# Altium PCB PCB1.PcbDoc
Units mm, origin at the board's own origin, x right, y up, seen from the top; angles counter-clockwise.
Board outline 179 x 157.5 mm, 2 copper layers (Top Layer, Bottom Layer); 92 components, 45 nets, 221 pads, 10 vias.
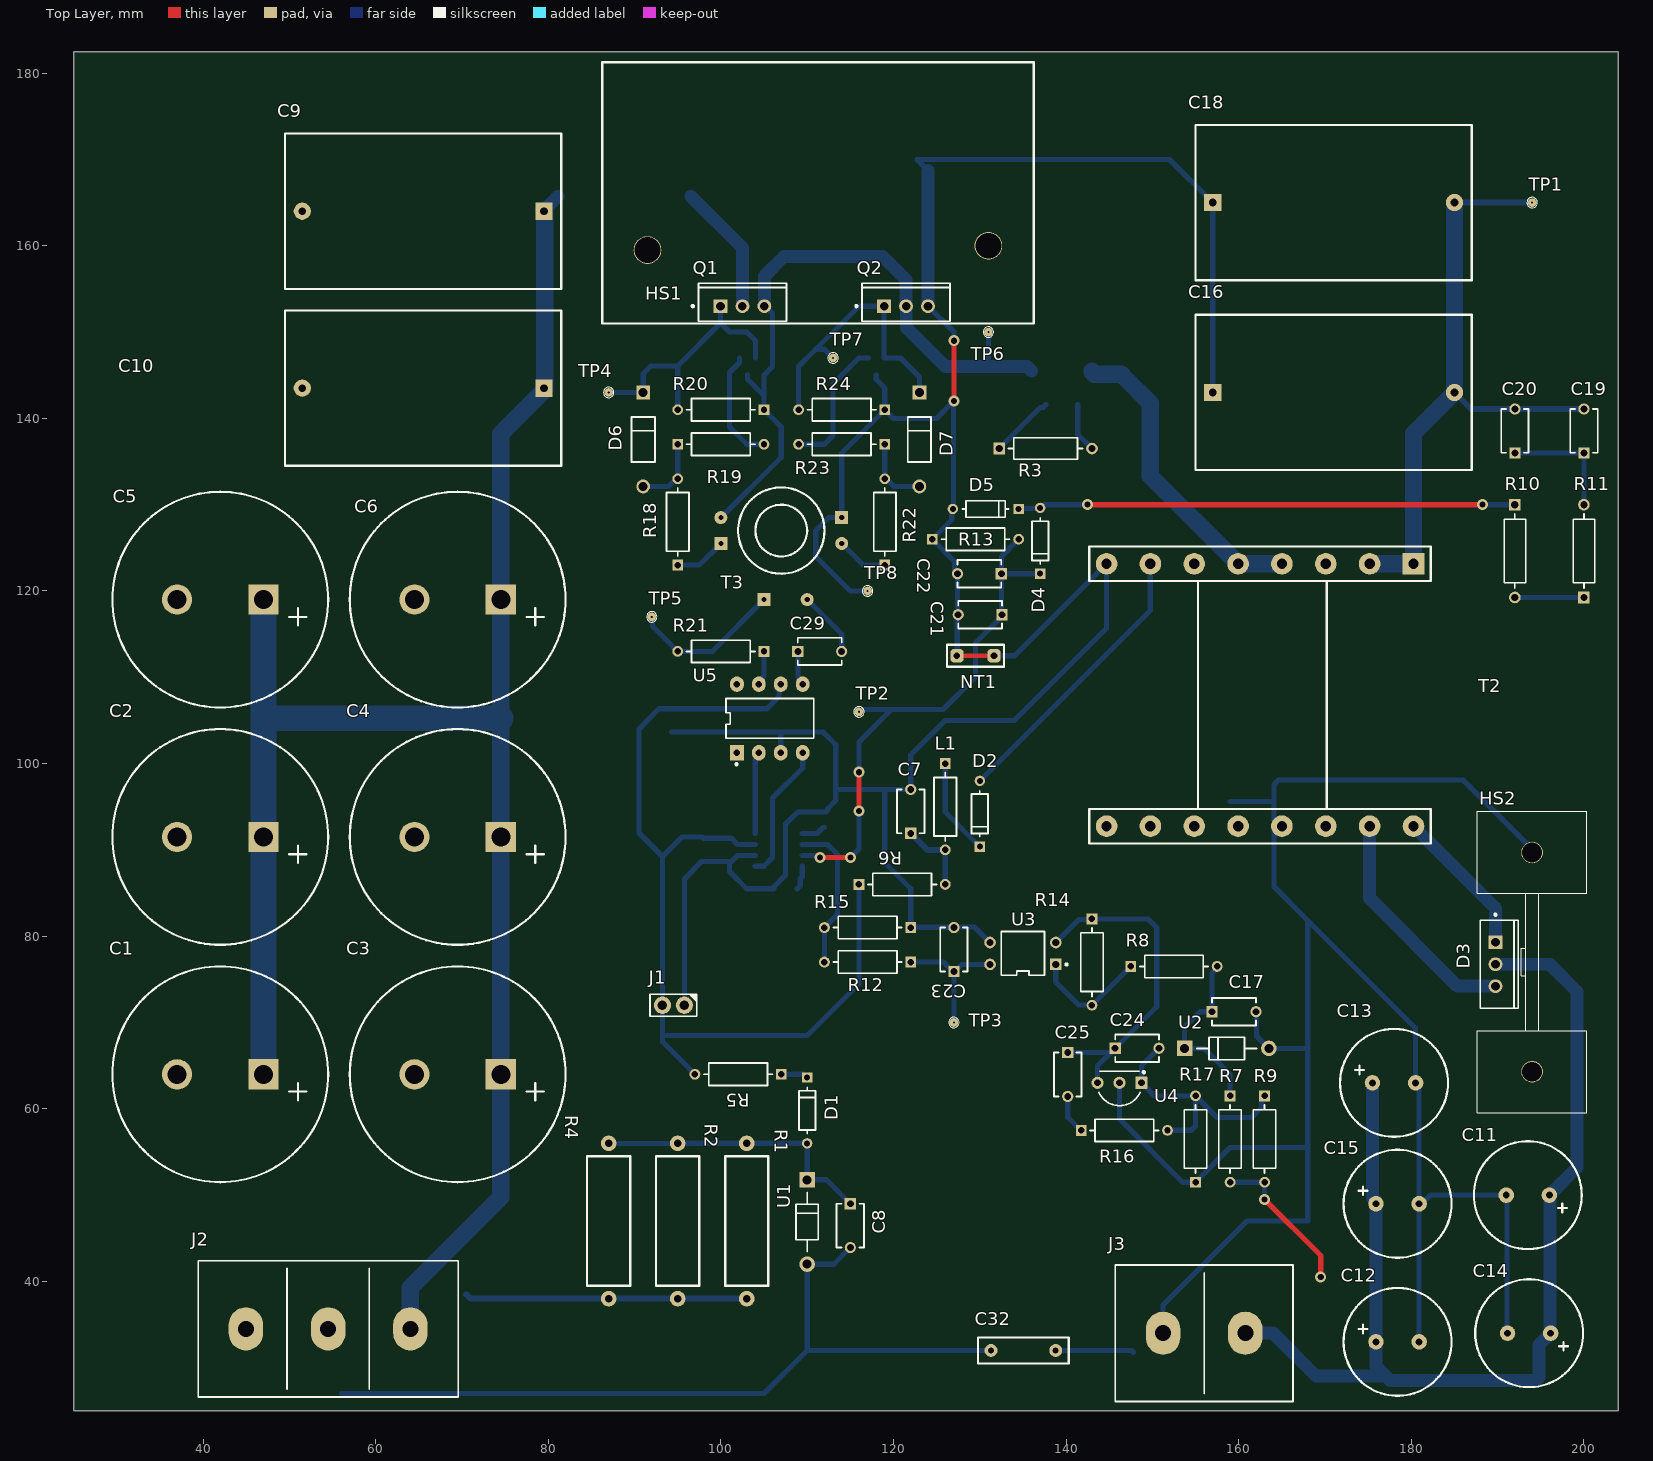
[diagram p0: Top Layer view]
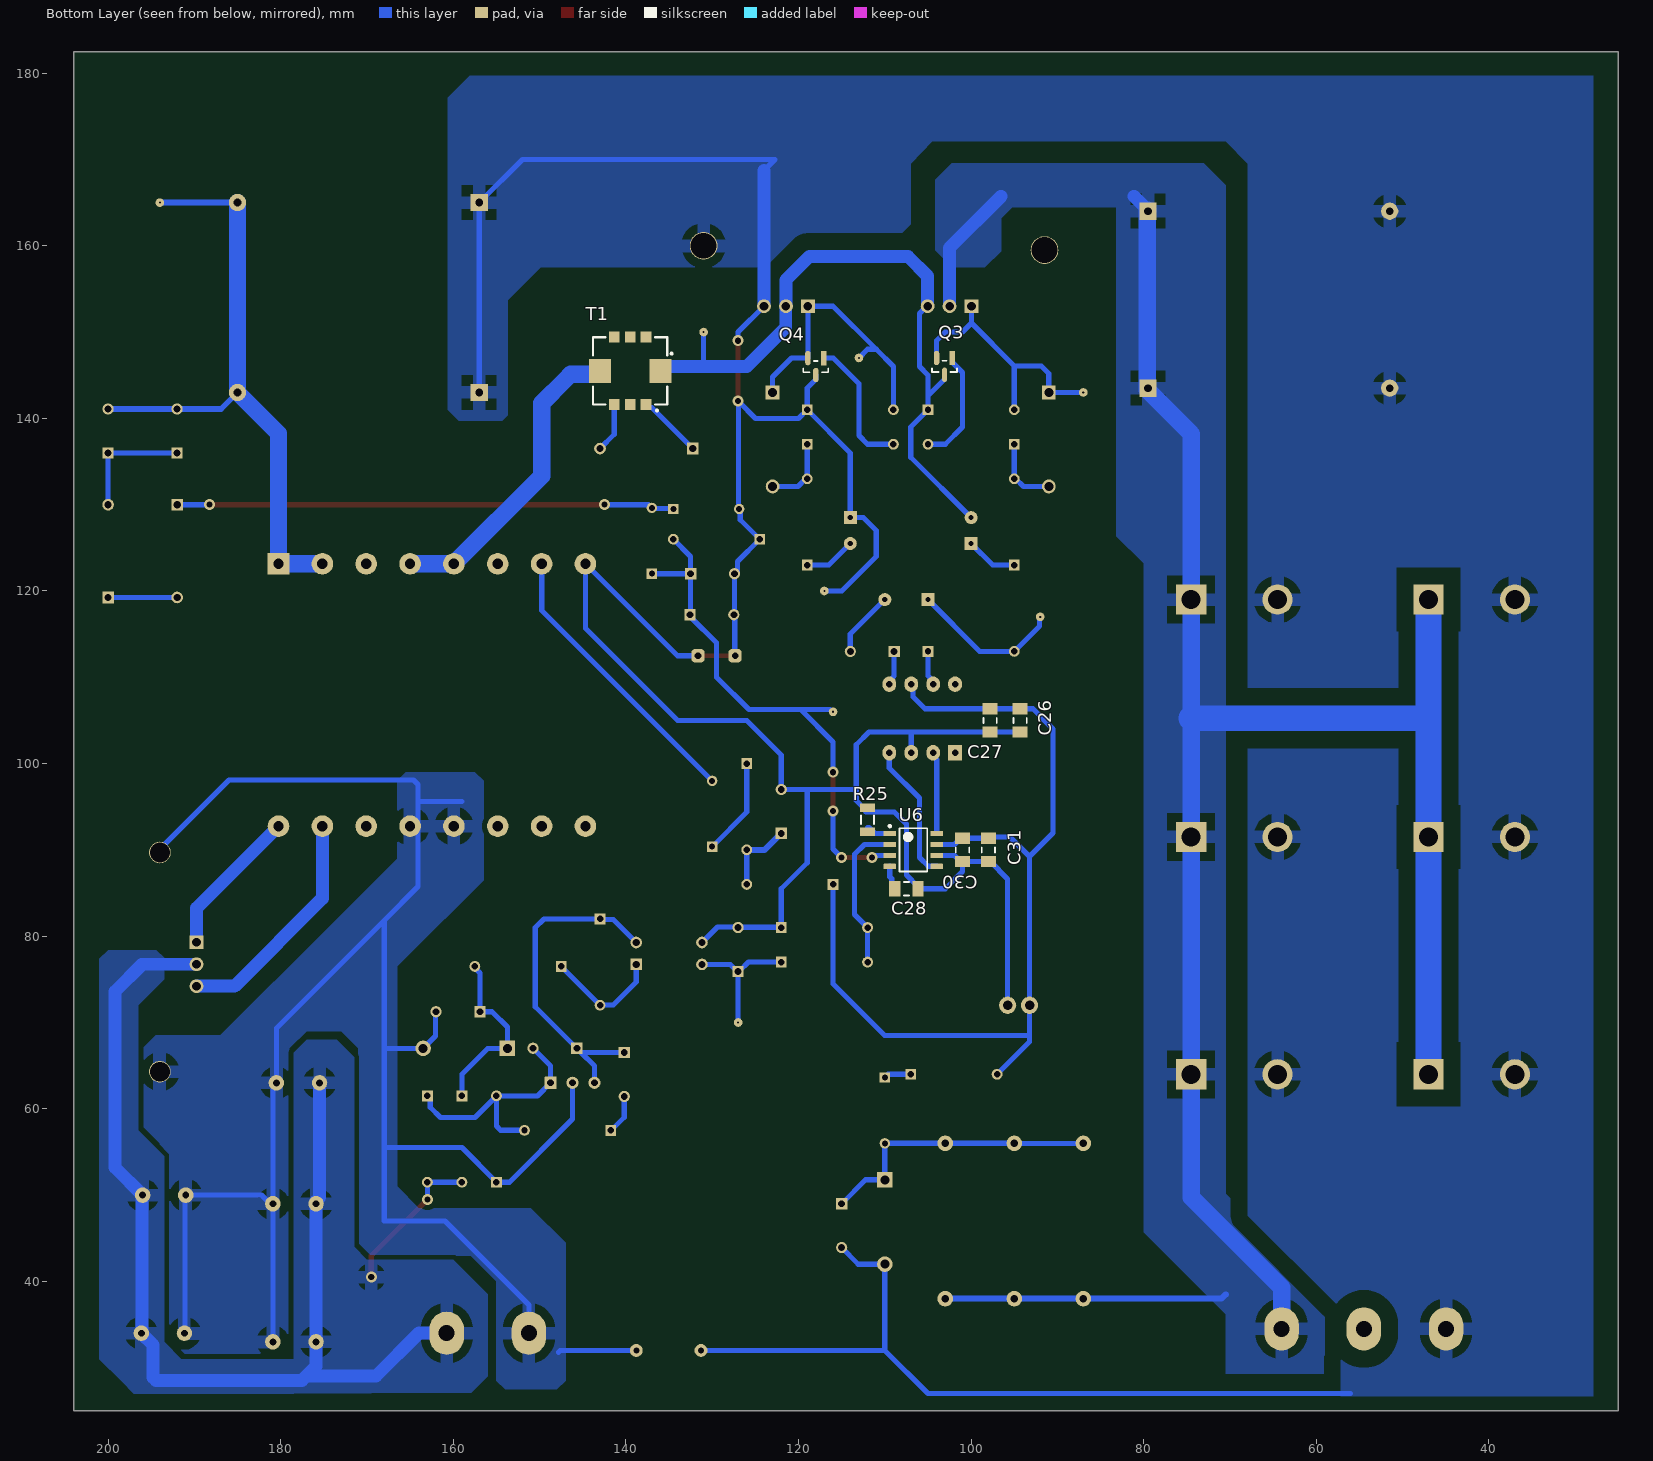
[diagram p1: Bottom Layer view, seen from below]
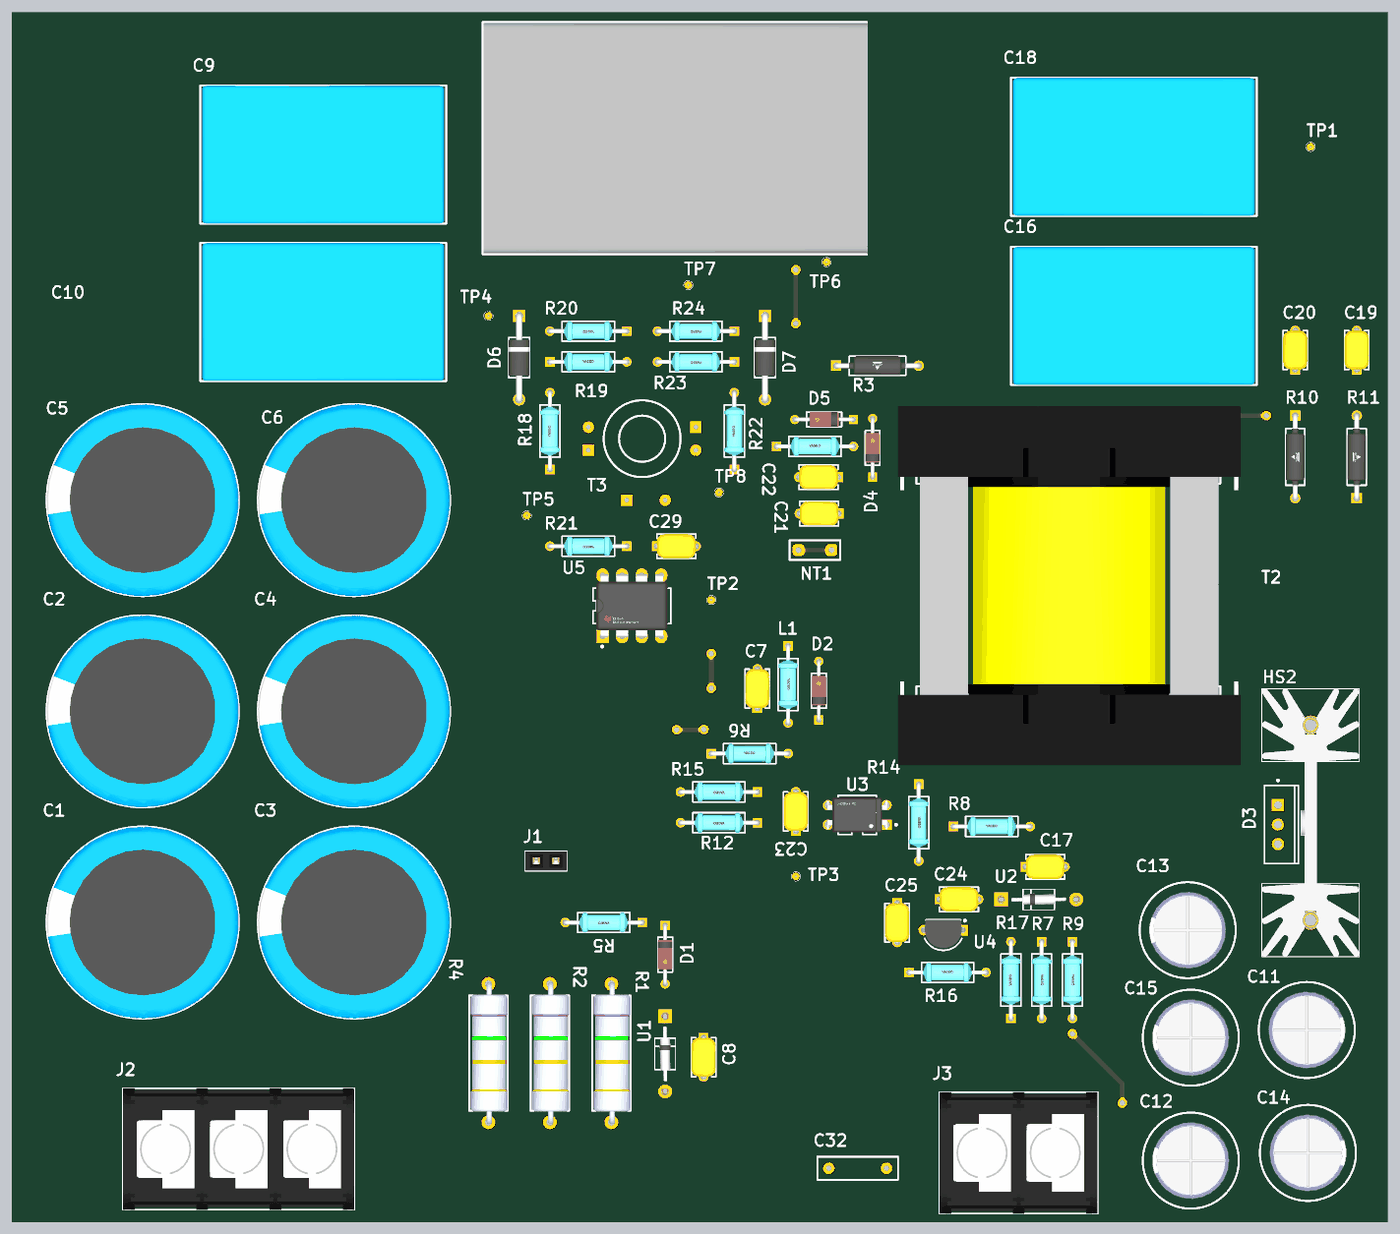
[diagram p2: 3D render of the assembled board from above, using the file's embedded part models]
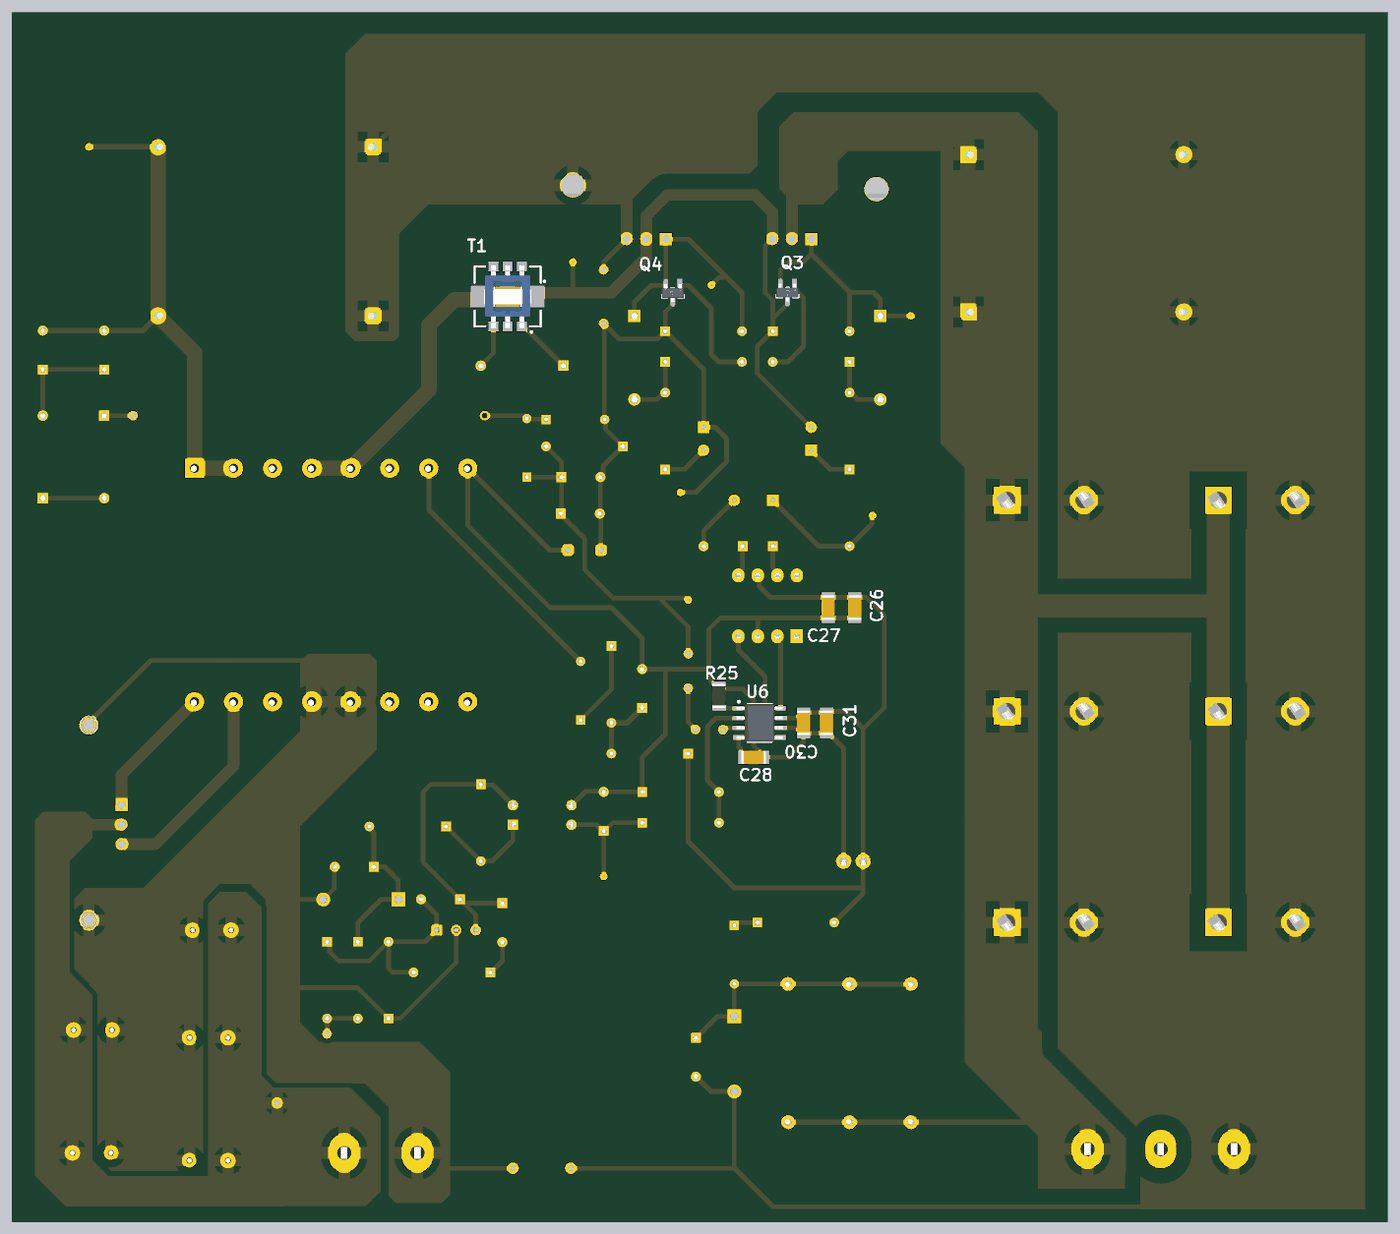
[diagram p3: 3D render of the assembled board from below, using the file's embedded part models]

## Layer stack, top to bottom
Top Solder: solder mask 0.0102, Solder Resist, Dk 3.5
Top Layer: signal copper 0.0356
Dielectric 1: dielectric 0.32, FR-4, Dk 4.8
Bottom Layer: signal copper 0.0356
Bottom Solder: solder mask 0.0102, Solder Resist, Dk 3.5

## Board outline
25,25 25,182.5 204,182.5 204,25

## Design rules (kind name [scope] priority, off if disabled: settings)
Clearance Clearance_Power [InNet('P_GND') or InNet('Vpower')  or InNet('Mid')] p1: gap=0.6 ignorepadtopadclearanceinfootprint=TRUE except(0.9: Arc-THPad Track-THPad; 1: Arc-Arc Arc-Track Track-Track; 2: Arc-Fill Arc-Poly Arc-Region Track-Fill Track-Poly Track-Region SMDPad-Fill SMDPad-Poly SMDPad-Region THPad-Fill THPad-Poly THPad-Region Via-Fill Via-Poly Via-Region Fill-Fill Fill-Poly Fill-Region Poly-Poly Poly-Region Region-Region)
Clearance [All] p2: gap=0.6 ignorepadtopadclearanceinfootprint=TRUE
Height [All] p1: minheight=0 maxheight=100 prefheight=12.7
MinimumSolderMaskSliver [All] p1: minsoldermaskwidth=0.1
PlaneConnect PlaneConnect_1 [All] p1: planeconnectstyle=Relief reliefexpansion=0.508 reliefentries=4 reliefconductorwidth=0.254 reliefairgap=0.254
PolygonConnect PowerPolygon [InNet('Vpower') or InNet('P_GND') or  InNet('+24V')  or  InNet('S_GND')] p1: connectstyle=Relief reliefconductorwidth=1.5 reliefentries=4 polygonreliefangle="90 Angle" airgapwidth=1
PolygonConnect PolygonConnect_1 [All] p2 off: connectstyle=Relief reliefconductorwidth=0.254 reliefentries=4 polygonreliefangle="90 Angle" airgapwidth=0.254
RoutingVias [All] p1: holewidth=0.711 width=1.27 viastyle="Through Hole" minholewidth=0.711 minwidth=1.27 maxholewidth=0.711 maxwidth=1.27
SilkToSilkClearance [All] p1: silktosilkclearance=0.1
SilkToSolderMaskClearance [IsPad] p1: minsilkscreentomaskgap=0.1 clearancetoexposedcopper=FALSE
SolderMaskExpansion [All] p1: expansion=0.102 istentingtop=FALSE
Width [All] p1: maxlimit=4 minlimit=0.6 preferedwidth=0.7
25 further rules are at their usual default settings.

## Components (designator, comment, footprint, x,y, rotation, side; value= is the part's Value field where it differs from the comment)
C1 "WCAP-AIL8" WCAP-AIL8 42,64 r180 top value=150u
C2 "WCAP-AIL8" WCAP-AIL8 42,91.5 r180 top value=150u
C3 "WCAP-AIL8" WCAP-AIL8 69.5,64 r180 top value=150u
C4 "WCAP-AIL8" WCAP-AIL8 69.5,91.5 r180 top value=150u
C5 "WCAP-AIL8" WCAP-AIL8 42,119 r180 top value=150u
C6 "WCAP-AIL8" WCAP-AIL8 69.5,119 r180 top value=150u
C7 "К10-17Б 10 мкФ Y5V" C322 122,91.92 r90 top value=10u
C8 "К10-17Б 10 мкФ Y5V" C322 115,49 r270 top value=10u
C9 "B32654A1154" B32654A1154 65.5,164 r180 top value=0.15u
C10 "B32654A1154" B32654A1154 65.5,143.5 r180 top value=0.15u
C11 "EKZN500ELL331MK16S" EKZN500ELL331MK16S 193.5,50 r180 top value=330u
C12 "EKZN500ELL331MK16S" EKZN500ELL331MK16S 178.404,32.997 r0 top value=330u
C13 "EKZN500ELL331MK16S" EKZN500ELL331MK16S 178,63 r0 top value=330u
C14 "EKZN500ELL331MK16S" EKZN500ELL331MK16S 193.649,33.997 r180 top value=330u
C15 "EKZN500ELL331MK16S" EKZN500ELL331MK16S 178.404,49 r0 top value=330u
C16 "B32654A1154" B32654A1154 171,143 r0 top value=0.15u
C17 "К10-17Б 0.1 мкФ X7R" C322 156.92,71.25 r0 top value=0.1u
C18 "B32654A1154" B32654A1154 171,165 r0 top value=0.15u
C19 "К10-17Б 150pF NP0" C322 200,136 r90 top value=150p
C20 "К10-17Б 150pF NP0" C322 192,136 r90 top value=150p
C21 "К10-17Б 10 нФ X7R" C322 132.58,117.25 r180 top value=10n
C22 "К10-17Б 10 нФ X7R" C322 132.5,122 r180 top value=10n
C23 "К10-17Б 4.7 нФ X7R" C322 127,75.92 r90 top value=4.7n
C24 "К10-17Б 10 нФ X7R" C322 145.691,67.019 r0 top value=10n
C25 "К10-17Б 68 нФ X7R" C322 140.191,66.519 r270 top value=68n
C26 "Конденсатор керамический smd 1 мкФ X7R" CAP_1206 94.319,105 r90 bottom value=1u
C27 "Конденсатор керамический smd 0.1 мкФ X7R" CAP_1206 97.8,105 r90 bottom value=0.1u
C28 "Конденсатор керамический smd 47 нФ X7R" CAP_1206 107.5,85.5 r180 bottom value=47n
C29 "К10-17Б 1 мкФ X7R" C322 108.92,113 r0 top value=1u
C30 "Конденсатор керамический smd 1 мкФ X7R" CAP_1206 101,90 r90 bottom value=1u
C31 "Конденсатор керамический smd 0.1 мкФ X7R" CAP_1206 98,90 r90 bottom value=0.1u
C32 "F222K47S3NN63J7R" F222K47S3NN63J7R 131.3,32 r0 top value=2.2n
D1 "BAT41" DO-35 110,63.626 r270 top
D2 "BAT41" DO-35 130,90.374 r90 top
D3 "STPS30150CT" STPS30150CT 189.75,79.29 r0 top
D4 "BAT41" DO-35 137,122 r90 top
D5 "BAT41" DO-35 134.5,129.5 r180 top
D6 "1N5819" 1N5819 91,143 r270 top
D7 "1N5819" 1N5819 123,143 r270 top
HS1 "SK481 50 AL" "SK481 50 AL" 111.25,159.75 r0 top
HS2 "SK 104 25.4 AL" "SK 104 25.4 AL" 194,77 r270 top
J1 "M20-7820242" "HARWIN M20-7820245" 94.5,72 r270 top
J2 "NC6-P108-03" "TE NC6-P108-03" 54.5,34.5 r0 top
J3 "NC6-P108-02" "TE NC6-P108-02" 156,34 r0 top
L1 "Inductor" EC24 126,100 r270 top value=4.7u
NT1 "NT" "NT_20mil - TH" 129.5,112.5 r0 top net-tie
Q1 "IRFB18N50KPBF" TO-220 99.96,153 r90 top
Q2 "IRFB18N50KPBF" TO-220 118.92,153 r90 top
Q3 "ZXTP2025FTA" ZXTP2025FTA 103.085,146.023 r270 bottom
Q4 "ZXTP2025FTA" ZXTP2025FTA 118,146 r270 bottom
R1 "MO-200 2 Вт, 75 кОм, 5%" C2-23-2 103,47 r90 top value=75k
R2 "MO-200 2 Вт, 75 кОм, 5%" C2-23-2 95,47 r90 top value=75k
R3 "MF-25 0.25 Вт, 100 Ом" CMF55 132.25,136.5 r0 top value=100
R4 "MO-200 2 Вт, 75 кОм, 5%" C2-23-2 87,47 r90 top value=75k
R5 "MF-25 0.25 Вт, 0 Ом" MF0 107,64 r180 top value=0
R6 "MF-25 0.25 Вт, 0 Ом" MF0 116,86 r0 top value=0
R7 "MF-25 0.25 Вт, 1.8 кОм" MF0 159,61.5 r270 top value=1.8k
R8 "MF-25 0.25 Вт, 4.3 кОм" MF0 147.5,76.5 r0 top value=4.3k
R9 "MF-25 0.25 Вт, 5.11 кОм, 1%" MF0 163,61.5 r270 top value=5.11k
R10 "CMF-55 0.5 Вт, 200 кОм, 1%" CMF55 192,130 r270 top value=200k
R11 "CMF-55 0.5 Вт, 200 кОм, 1%" CMF55 200,119.25 r90 top value=200k
R12 "MF-25 0.25 Вт, 4.3 кОм" MF0 122,77 r180 top value=4.3k
R13 "MF-25 0.25 Вт, 6.34 кОм, 1%" MF0 124.5,126 r0 top value=6.34k
R14 "MF-25 0.25 Вт, 1 кОм, 1%" MF0 143,82 r270 top value=1k
R15 "MF-25 0.25 Вт, 2.4 кОм, 1%" MF0 122,81 r180 top value=2.4k
R16 "MF-25 0.25 Вт, 4.7 кОм, 1%" MF0 141.75,57.5 r0 top value=4.7k
R17 "MF-25 0.25 Вт, 44.2 кОм, 1%" MF0 155,51.5 r90 top value=44.2k
R18 "MF-25 0.25 Вт, 8 Ом, 1%" MF0 95,123 r90 top value=8
R19 "MF-25 0.25 Вт, 1 кОм, 1%" MF0 95,137 r0 top value=1k
R20 "MF-25 0.25 Вт, 10 кОм, 1%" MF0 105,141 r180 top value=10k
R21 "MF-25 0.25 Вт, 0 Ом" MF0 105,113 r180 top value=0
R22 "MF-25 0.25 Вт, 8 Ом, 1%" MF0 119,123 r90 top value=8
R23 "MF-25 0.25 Вт, 1 кОм, 1%" MF0 119,137 r180 top value=1k
R24 "MF-25 0.25 Вт, 10 кОм, 1%" MF0 119,141 r180 top value=10k
R25 "SMD 0.25 Вт, 7.5 кОм, 1%" RESC3016X06N 112,93.5 r270 bottom value=7.5k
T1 "1:100" В82801В205А100 139.5,145.5 r90 bottom
T2 "NxNxNxN" "ETD39 BOBBIN" 162.47,107.95 r270 top
T3 "NxNxN" Trans2 107,127 r90 top
TP1 "TP" "Test Point Hole" 194,165 r90 top
TP2 "TP" "Test Point Hole" 116,106 r90 top
TP3 "TP" "Test Point Hole" 127,70 r90 top
TP4 "TP" "Test Point Hole" 87,143 r90 top
TP5 "TP" "Test Point Hole" 92,117 r90 top
TP6 "TP" "Test Point Hole" 131,150 r90 top
TP7 "TP" "Test Point Hole" 113,147 r90 top
TP8 "TP" "Test Point Hole" 117,120 r90 top
U1 "BZX85C15-TAP" BZX85C15-TAP 110,51.776 r270 top
U2 "BZX85C15-TAP" BZX85C15-TAP 153.724,67 r0 top
U3 "PC817" PC817 135,78 r180 top
U4 "TL431" TL431 146.191,63.019 r270 top
U5 "IR4427STRPBF" DIP-8 105.67,105.23 r90 top
U6 "UCC25600DR" SOIC-8 106.7,90 r180 bottom

## Footprints (in the part's own frame and the unit in brackets; to place one, negate y for a bottom-side part, rotate by r counter-clockwise, add the part's x,y. Pads: shape width x height; smd on the part's side, far side on the other; paste and mask are expansions set on the pad)
1N5819 [mm]
  rect 1.6x1.6 hole 1.05 paste-1000 mask+0: 1(0,0)
  round 1.6 hole 1.05 paste-1000 mask+0: 2(10.886,0)
  silkscreen extent 2.84,-1.36 8.05,1.36, body extent -0.9,-1.46 11.79,1.46, height 0.25
B32654A1154 [mm]
  rect 2x2 hole 0.9: 1(-14,0)
  round 2 hole 0.9: 2(14,0)
  silkscreen extent -16,-9 16,9, body extent -15.75,-9 15.75,9, height 27.5
BZX85C15-TAP [mm]
  rect 1.8x1.8 hole 1.05 paste-1000 mask+0: 1(0,0)
  round 1.8 hole 1.05 paste-1000 mask+0: 2(9.776,0)
  silkscreen extent 1.44,-1.3 8.34,1.3, body extent -0.9,-1.4 10.68,1.4, height 0.25
C2-23-2 [mm]
  round 1.8 hole 0.9: 1(-9,0) 2(9,0)
  silkscreen extent -7.5,-2.5 7.5,2.5, body extent -9.24,-2.5 9.24,2.28, height 5.72
C322 [mm]
  rect 1.3x1.3 hole 0.8 paste-1000 mask+0: 1(0,0)
  round 1.3 hole 0.8 paste-1000 mask+0: 2(5.08,0)
  silkscreen extent 0,-1.59 5.08,1.59, body extent -0.75,-1.69 5.83,1.69, height 0.25
CAP_1206 [mm]
  rect 1.3x1.75 smd: 1(-1.35,0) 2(1.35,0)
  silkscreen extent -0.3,-0.77 0.3,0.77, body extent -1.6,-0.85 1.6,0.85, height 1.5
CMF55 [mm]
  rect 1.35x1.35 hole 0.85 paste-1000 mask+0: 1(0,0)
  round 1.35 hole 0.85 paste-1000 mask+0: 2(10.75,0)
  silkscreen extent 1.08,-1.24 9.67,1.24, body extent -0.77,-1.35 11.53,1.35, height 0.25
DIP-8 [mm]
  rect 1.8x1.6 hole 0.75 paste-1000 mask+0: 1(-3.97,3.81)
  oval 1.8x1.6 hole 0.75 paste-1000 mask+0: 2(-3.97,1.27) 3(-3.97,-1.27) 4(-3.97,-3.81) 5(3.97,-3.81) 6(3.97,-1.27) 7(3.97,1.27) 8(3.97,3.81)
  silkscreen extent -5.42,-5.08 2.3,5.08, body extent -4.29,-4.64 4.29,4.64, height 5.08
DO-35 [mm]
  rect 1.2x1.2 hole 0.7 paste-1000 mask+0: 1(0,0)
  round 1.2 hole 0.7 paste-1000 mask+0: 2(7.626,0)
  silkscreen extent 1.13,-0.95 6.49,0.95, body extent -0.7,-1.05 8.33,1.05, height 0.25
EC24 [mm]
  rect 1.25x1.25 hole 0.75 paste-1000 mask+0: 1(0,0)
  round 1.25 hole 0.75 paste-1000 mask+0: 2(10,0)
  silkscreen extent 1.02,-1.3 8.98,1.3, body extent -0.72,-1.4 10.73,1.4, height 0.25
EKZN500ELL331MK16S [mm]
  round 1.8 hole 0.8: 1(-2.5,0) 2(2.5,0)
  silkscreen extent -6.25,-6.25 6.25,6.25, body extent -5,-5 5,5, height 20.01
"ETD39 BOBBIN" [mm]
  round 2.5 hole 1.2: 1(-15.2,-2.54) 1(-15.2,2.54) 2(-15.2,12.7) 3(-15.2,7.62) 6(-15.2,-7.62) 7(-15.2,-12.7) 8(-15.2,-17.78) 9(15.2,-17.78) 10(15.2,-12.7) 11(15.2,-7.62) 12(15.2,-2.54) 13(15.2,2.54) 14(15.2,7.62) 15(15.2,12.7) 16(15.2,17.78)
  rect 2.5x2.5 hole 1.2: 2(-15.2,17.78)
  silkscreen extent -17.2,-19.78 17.2,19.78, body extent -23.3,-22.2 23.5,22.4, height 36.24
F222K47S3NN63J7R [mm]
  round 1.5 hole 0.7: 1(0,0) 2(7.5,0)
  silkscreen extent -1.5,-1.5 9,1.5
"HARWIN M20-7820245" [mm] "2.54mm DIL PC TAIL PIN HEADER ASSEMBLY"
  round 2 hole 1.1: 1(0,1.27) 2(0,-1.27)
  silkscreen extent -1.27,-2.7 1.27,2.73, body extent -1.25,-2.74 1.25,2.74, height 8.5
MF0 [mm]
  rect 1.25x1.25 hole 0.75 paste-1000 mask+0: 1(0,0)
  round 1.25 hole 0.75 paste-1000 mask+0: 2(10,0)
  silkscreen extent 1.02,-1.3 8.98,1.3, body extent -0.28,-1.29 10.28,1.29, height 2.6
"NT_20mil - TH" [mil] "20mil Uninsulated Shorting Plug"
  rrect50% 60x60 hole 30: 1(-84.53,0) 2(84.53,0)
  Top Layer region: -64.84,-10 74.53,-10 74.53,10 -64.84,10
  silkscreen extent -130,-50 130,50
PC817 [mm]
  rect 1.35x1.35 hole 0.85 paste-1000 mask+0: 1(-3.81,1.27)
  round 1.35 hole 0.85 paste-1000 mask+0: 2(-3.81,-1.27) 3(3.81,-1.27) 4(3.81,1.27)
  silkscreen extent -5.18,-2.54 2.5,2.54, body extent -4.58,-2.64 4.58,2.64, height 0.25
RESC3016X06N [mm] "Chip Resistor, 2-Leads, Body 3,05x1,60mm, IPC Medium Density"
  rect 1x1.7 smd: 1(-1.4,0) 2(1.4,0)
  silkscreen extent -0.5,-0.75 0.5,0.75, body extent -1.55,-0.85 1.55,0.85, height 0.6
"SK481 50 AL" [mm]
  round 3.2 hole 3: 1(19.75,0.25) 2(-19.75,-0.25)
  silkscreen extent -25,-8.75 25,21.5, body extent -24.9,-8.6 25.1,21.4, height 45
"SK 104 25.4 AL" [mm]
  round 2.5 hole 2.3: 1(-12.7,0) 1(12.7,0)
  silkscreen extent -17.45,-6.35 17.45,6.35, body extent -17.45,-6.35 17.45,6.35, height 25.4
SOIC-8 [mm] "SOIC, 8-Leads, Body 5x4mm, Pitch 1.27mm, IPC Medium Density"
  rrect17% 1.45x0.6 smd: 1(-2.725,1.905) 2(-2.725,0.635) 3(-2.725,-0.635) 4(-2.725,-1.905) 5(2.725,-1.905) 6(2.725,-0.635) 7(2.725,0.635) 8(2.725,1.905)
  silkscreen extent -2.85,-2.5 1.6,2.88, body extent -3,-2.45 3,2.45, height 1.63
STPS30150CT [mm]
  rect 1.6x1.6 hole 1: A1(0,0)
  round 1.6 hole 1: A2(0,-5.08) K(0,-2.54)
  silkscreen extent -1.75,-7.64 2.65,3.33, body extent -1.75,-7.64 2.65,2.56, height 20.7
"TE NC6-P108-02" [mm]
  oval 4x5 hole 1.854: 1(-4.763,0) 2(4.763,0)
  silkscreen extent -10.3,-7.9 10.3,7.9, body extent -10.31,-7.94 10.29,7.94, height 16.38
"TE NC6-P108-03" [mm]
  oval 4x5 hole 1.854: 1(-9.525,0) 2(0,0) 3(9.526,0)
  silkscreen extent -15.06,-7.9 15.06,7.9, body extent -15.07,-7.94 15.05,7.94, height 16.38
"Test Point Hole" [mm]
  round 1 hole 0.254: 1(0,0)
  silkscreen extent -0.61,-0.61 0.61,0.61
TL431 [mm] "TO, Flat Index; 3 In-Line, Formed Axial Leads; Body Dia. 4.8mm; Leads 0.56 x 0.41 mm (max)"
  rrect7% 1.4x1.4 hole 0.8: 1(0,2.54)
  round 1.4 hole 0.8: 2(0,0) 3(0,-2.54)
  silkscreen extent -1.35,-2.41 2.65,2.95, body extent -1.33,-2.83 2.35,2.83, height 9.01
TO-220 [mm]
  round 1.6 hole 1: D(0,-2.54) S(0,-5.08)
  rect 1.6x1.6 hole 1: G(0,0)
  silkscreen extent -1.75,-7.64 2.65,3.33, body extent -1.75,-7.64 2.65,2.56, height 20.7
Trans2 [mm]
  rect 1.5x1.5 hole 0.6: 1(-8,2) 3(-1.5,7) 6(1.5,-7)
  round 1.5 hole 0.6: 2(-8,-3) 4(1.5,7) 5(-1.5,-7)
  silkscreen extent -5,-5 5,5
WCAP-AIL8 [mm]
  rect 3.5x3.5 hole 2.2: 1(-5,0)
  round 3.5 hole 2.2: 2(5,0)
  silkscreen extent -12.5,-12.5 12.5,12.5, body extent -17.6,-17.6 17.61,17.61, height 31
ZXTP2025FTA [mm]
  rect 1.659x0.627 smd paste+0 mask+0: 1(-0.977,0.915)
  rrect100% 1.659x0.627 smd paste+0 mask+0: 2(-0.977,-0.915) 3(0.977,0)
  silkscreen extent -0.65,-1.45 0.65,1.45, body extent -1.15,-1.43 1.15,1.43, height 1.1
В82801В205А100 [mm]
  rect 1.28x1.27 smd: 1(-3.91,-1.85) 3(-3.91,1.85) 4(3.91,1.85) 6(3.91,-1.85) NC(-3.91,0) NC(3.91,0)
  rect 2.8x2.55 smd: 7(0,3.5) 8(0,-3.5)
  silkscreen extent -4.7,-4.9 3.9,4.3, body extent -4.08,-3.05 4.08,3.05, height 5.06

## Part data
C7 C8 C11 C12 C13 C14 C15 C17 C21 C22 C23 C24 C25 C29: Voltage=50V
C19 C20: Voltage=500V
C26 C30: library part "SMD 1206 1 мкФ X7R", Voltage=50V
C27 C31: library part "SMD 1206 0.1 мкФ X7R", Voltage=50V
C28: library part "SMD 1206 47 нФ X7R", Voltage=50V
J1: "CONN RCPT 2POS 0.1 GOLD PCB", Current Rating (Amps)=3A, Insulation Color=Black, Manufacturer="Harwin Inc.", Material Flammability Rating="UL94 V-0", Operating Temperature="-40°C ~ 105°C", Supplier Part Number 1=952-1775-ND, ComponentLink1Description=Datasheet, ComponentLink1URL=https://cdn.harwin.com/pdfs/C001XX_M20_Series_Connectors.pdf, ComponentLink2Description="DigiKey Link", ComponentLink2URL=https://www.digikey.com/en/products/detail/harwin-inc/M20-7820242/3727744, Connector Type=Receptacle, Contact Finish - Mating=Gold, Contact Finish - Post=Tin, Contact Finish Thickness - Mating=Flash, Contact Length - Post="0.118\" (3.00mm)", Contact Type="Female Socket", Fastening Type=Push-Pull, Insulation Height="0.335\" (8.51mm)", LastUpdated="21.09.2022 18:53:47", Lifecycle Status=Active, Mated Stacking Heights="11.04mm, 12.63mm", Minimum Order=1, Mounting Type="Through Hole", Number of Positions=2, Number of Positions Loaded=All, Number of Rows=1, Packaging=Tube, Part Number=M20-7820242, Part Status=Active, Pitch - Mating="0.100\" (2.54mm)", Price=0.38, Series=M20, Style="Board to Board or Cable", Supplier 1=DigiKey, Termination=Solder
J2: "CONN BARRIER STRIP 3CIRC 0.375\"", Color=Black, Current Rating (Amps)=20A, Manufacturer="TE Connectivity AMP Connectors", Supplier Part Number 1=A98496-ND, Voltage Rating=300V, Barrier Type="2 Wall (Dual)", Bottom Termination="PC Pin", ComponentLink1Description=Datasheet, ComponentLink1URL=https://www.te.com/commerce/DocumentDelivery/DDEController?Action=srchrtrv&DocNm=3-1437664-0&DocType=Customer+Drawing&DocLang=English, ComponentLink2Description="DigiKey Link", ComponentLink2URL=http://digikey.com/product-detail/en/te-connectivity-amp-connectors/NC6-P108-03/A98496-ND/1277927, LastUpdated="15.01.2020 4:12:05", Lifecycle Status=Active, Minimum Order=1, Number of Circuits=3, Number of Rows=1, Number of Wire Entries=3, Packaging=Bulk, Part Number=NC6-P108-03, Part Status=Active, Pitch="0.375\" (9.53mm)", Price=2.16, Series="NC6, Buchanan", Supplier 1=DigiKey, Terminal Block Type="Barrier Block", Top Termination="Screws with Captive Plate", Wire Gauge="12-22 AWG"
J3: "CONN BARRIER STRIP 2CIRC 0.375\"", Color=Black, Current Rating (Amps)=20A, Manufacturer="TE Connectivity AMP Connectors", Supplier Part Number 1=A98495-ND, Voltage Rating=300V, Barrier Type="2 Wall (Dual)", Bottom Termination="PC Pin", ComponentLink1Description=Datasheet, ComponentLink1URL=https://www.te.com/commerce/DocumentDelivery/DDEController?Action=srchrtrv&DocNm=3-1437664-0&DocType=Customer+Drawing&DocLang=English, ComponentLink2Description="DigiKey Link", ComponentLink2URL=http://digikey.com/product-detail/en/te-connectivity-amp-connectors/NC6-P108-02/A98495-ND/1277926, LastUpdated="15.01.2020 4:11:24", Lifecycle Status=Active, Minimum Order=1, Number of Circuits=2, Number of Rows=1, Number of Wire Entries=2, Packaging=Bulk, Part Number=NC6-P108-02, Part Status=Active, Pitch="0.375\" (9.53mm)", Price=1.56, Series="NC6, Buchanan", Supplier 1=DigiKey, Terminal Block Type="Barrier Block", Top Termination="Screws with Captive Plate", Wire Gauge="12-22 AWG"
Q1 Q2: "N-channel mosfet transistor"
R1 R2 R4: Voltage=750V
R3 R5 R6 R9 R10 R11 R13 R14 R15 R16 R17 R18 R19 R20 R21 R22 R23 R24: Voltage=250V
R7: library part "MF-25 0.25 Вт, 1.8 кОм, 1%", Voltage=250V
R8 R12: library part "MF-25 0.25 Вт, 4.3 кОм, 1%", Voltage=250V
R25: library part "SMD 1206 0.25 Вт, 7.5 кОм, 1%", Voltage=250V
T1: library part В82801В205А100
T2: library part "Transformer 1x3"
T3: library part "Transformer 1x2"
U5: library part IR4427, "IC GATE DRVR LOW-SIDE", Ambient Temperature Range High=+125°C, Ambient Temperature Range Low=-40°C, Manufacturer=Infineon, Max Junction Temp=+150°C, Max Power Dissipation=0.625W, Max Supply Voltage=20V, Min Supply Voltage=6V, Nominal Supply Current=100uA, Output Current=1.5A, Output Voltage=6-20V, Package=PG-DSO-8, Temperature="to +150°C", Automotive=No, Category=IC, ComponentLink2Description=Datasheet, ComponentLink2URL=https://www.infineon.com/dgdl/ir4426.pdf?fileId=5546d462533600a4015355d60b491822, Device Class L1="Integrated Circuits (ICs)", Device Class L2="Power Management ICs", Device Class L3="Gate Drivers", Digikey Description="IC GATE DRVR LOW-SIDE 8SOIC", Fall Time=10ns, Footprint Url=https://www.infineon.com/dgdl/Infineon-po-8leadsoic-P-v01_00-EN.pdf?fileId=5546d462580663ef0158068b4ad80177, Height=1.75mm, Ipc Land Pattern Name=SOIC127P600X155-8, Lead Free=Yes, Manufacturer Part Number=IR4427STRPBF, Number of Drivers=2, Number Of Outputs=2, Octopart=https://octopart.com/ir4427strpbf-infineon-65873145, Rise Time=15ns, RoHS=TRUE, Standoff Height=0.1mm, Temperature Range High=+150°C, Turn Off Delay Time=65ns, Turn On Delay Time=85ns
U6: "High-Performance Resonant Mode Controller with Voltage Control, 50 % Duty Cycle, -40 to +125 degC, 8-pin SOIC (D), Green (RoHS & no Sb/Br)", Frequency(Max)(kHz)=350, Manufacturer="Texas Instruments", Rating=Catalog, Code_JEDEC=MS-012AA, ComponentLink1Description=Datasheet, ComponentLink1URL=http://www.ti.com/general/docs/lit/getliterature.tsp?genericPartNumber=UCC25600&fileType=pdf, Control Method=Voltage, DatasheetVersion=SLUS846B, Duty Cycle(Max)(%)=50, Eco-Plan="Green (RoHS & no Sb/Br)", Mounting Technology="Surface Mount", PackageDescription="8-Pin Plastic Small Outline Integrated Circuit, 4.9 x 3.9 mm, Pitch 1.27 mm Pitch", PackageReference=D0008A, PackageVersion="revM, Jun-2011", PartNumber=UCC25600DR, Regulated Outputs(#)=2, SubFamily="PWM Controller", Topology="Resonant, Half-Bridge", UVLO Thresholds On/Off(V)=10.5/9.5

## Via types
v1: diameter 1.27, hole 0.711, Top Layer to Bottom Layer, 10 vias

## Nets (pads, with @x,y where several pads share a name; then routed paths per layer and width w, separated by ;. In a path a pad name is that pad's centre, name@x,y a point inside that pad or via, vN(x,y) a via of type N, cw(c..) or ccw(c..) an arc to the next point about the centre after c; other vN are vias at no path point)
+24V: C11.1 C12.1 C13.1 C14.1 C15.1 D3.K J3.2 R7.2 R9.2 | length 146.2
  Top Layer w0.6: v1(163,49.5) 169.5,43 v1(169.5,40.5)
  Bottom Layer w0.6: R7.2 R9.2 v1(163,49.5)
  Bottom Layer w1.5: J3.2 164,34 168.963,29.037 177.037,29.037 ; C13.1 175.5,49.729 175.904,49.325 C15.1 C12.1 175.904,30.171 177.037,29.037 ; D3.K 196.05,76.75 199.2,73.6 199.2,53.2 C11.1 196.074,49.926 196.074,34.071 C14.1 194.8,32.648 194.8,28.876 194.449,28.525 177.55,28.525 177.037,29.037
C_GND: C7.2 C23.2 C26.1 C27.1 C28.2 C30.1 C31.1 J1.1 NT1.2 R15.1 R25.1 T2.8 U3.3 U5.3 U6.6 | length 168.3
  Bottom Layer w0.6: C26.1 C27.1 106.85,103.65 ; J1.1 95.77,86.645 97.775,88.65 C31.1 C30.1 ; U6.6 101.94,89.365 101.225,88.65 C30.1 ; U5.3 106.94,103.56 106.85,103.65 ; U3.3 129.38,81.08 127,81.08 126.96,81.04 122.04,81.04 R15.1 122,85.5 119,88.5 119,97 ; NT1.2 134.04,112.5 T2.8 144.69,115.69 134,105 126,105 122,101 C7.2 119,97 ; C30.1 101,87.5 103,85.5 C28.2 106.15,85.725 107.5,87.075 107.5,93 108.9,94.4 112,94.4 112.175,94.4 112.375,94.6 112.375,94.775 113.319,95.719 113.319,97 ; 106.85,103.65 111.85,103.65 113.319,102.181 113.319,97 ; 113.319,97 119,97
GD1: U5.2 U6.8 | length 9.5
  Bottom Layer w0.6: U6.8 103.975,100.464 104.4,100.889 U5.2
GD2: U5.4 U6.5 | length 16
  Bottom Layer w0.6: U6.5 104.973,88.095 106,89.122 106,96 109.48,99.48 U5.4
HS: D6.1 Q1.G Q3.2 R20.2 TP4.1 | length 31.5
  Bottom Layer w0.6: TP4.1 D6.1 91,145.2 91.88,146.08 95,146.08 ; R20.2 95,146.08 ; Q1.G 99.96,151.04 ; Q3.2 104,149 103,150 101,150 99.96,151.04 ; 95,146.08 99.96,151.04
LS: D7.1 Q2.G Q4.2 R24.2 TP7.1 | length 33
  Bottom Layer w0.6: R24.2 109,146 111,148 ; TP7.1 112,148 111,148 ; D7.1 123,144.8 120.823,146.977 Q4.2 118.917,146.979 118.917,152.997 Q2.G 116,153 111,148
Mid: Q1.S Q2.D Q3.3 R20.1 T1.8 T3.4 TP6.1 | length 80.5
  Bottom Layer w0.6: T3.4 107,135.5 107,139 R20.1 105,142.616 ; Q3.3 103.085,144.531 105,142.616 ; Q1.S 105.149,153 106,152.149 106,146 105,145 105,142.616 ; 130.75,146 131,146.25 TP6.1
  Bottom Layer w1.5: Q1.S 105.04,156.475 107.315,158.75 118.745,158.75 121.445,156.05 121.445,153.015 Q2.D 121.479,152.981 121.479,150.521 126,146 130.75,146 135.5,146 T1.8
NetC7_1: C7.1 L1.2 R6.2 | length 8.9
  Bottom Layer w0.6: R6.2 L1.2
  Bottom Layer w0.7: C7.1@121.95,91.87 C7.1 123.92,90 L1.2
NetC8_1: C8.1 D1.2 R1.2 R2.2 R4.2 U1.1 | length 33.6
  Bottom Layer w0.6: R4.2@86.8,55.927 86.837,55.964 94.964,55.964 R2.2 R1.2 D1.2 U1.1 112.224,51.776 C8.1
NetC16_2: C16.2 C18.2 C19.2 C20.2 T2.2 TP1.1 | length 73.7
  Bottom Layer w0.7: C16.2 186.92,141.08 C20.2 C19.2 ; C18.2 TP1.1
  Bottom Layer w2: T2.2@175.17,123.15 180.25,123.15 180.25,138.25 C16.2 C18.2
NetC17_1: C17.1 R7.1 R8.2 U2.1 | length 20.9
  Bottom Layer w0.6: R8.2 157.5,76.324 156.92,75.744 C17.1 155.5,71.25 153.724,69.474 U2.1 156,67 159,64 R7.1
NetC19_1: C19.1 C20.1 R11.2 | length 14
  Bottom Layer w0.6: C20.1 C19.1 R11.2
NetC23_1: C23.1 R12.1 TP3.1 U3.4 | length 15.9
  Bottom Layer w0.6: R12.1 125.811,77 126.811,76 C23.1@127,76 ; TP3.1 C23.1@127,76 ; U3.4 127.919,76.73 127.189,76 C23.1@127,76
NetC24_1: C24.1 C25.1 R14.1 U3.2 U4.3 | length 39.1
  Bottom Layer w0.6: U3.2 141.475,81.935 142.935,81.935 R14.1 149.5,82 150.5,81 150.5,71.828 C24.1 C24.1@145.191,66.519 ; C25.1 C24.1@145.191,66.519 ; U4.3 143.651,64.979 C24.1@145.191,66.519
NetC24_2: C24.2 R9.1 R16.2 R17.2 U4.1 | length 29.4
  Bottom Layer w0.6: C24.2 148.731,64.979 U4.1 150.249,61.5 R17.2 ; R16.2@151.691,57.519 154.519,57.519 155,58 R17.2 ; R9.1 162.675,61.175 162.675,60.175 161.5,59 157.5,59 R17.2
NetC25_2: C25.2 R16.1 | length 4.5
  Bottom Layer w0.6: C25.2 140.191,59.019 R16.1@141.691,57.519
NetC28_1: C28.1 U6.4 | length 2.8
  Bottom Layer w0.6: C28.1 109.2,85.85 109.2,86.67 109.425,86.895 U6.4
NetC29_1: C29.1 U5.5 | length 4
  Bottom Layer w0.6: C29.1 108.92,110.131 109.48,109.571 U5.5
NetC29_2: C29.2 T3.2 | length 7.7
  Bottom Layer w0.6: T3.2 114,115 C29.2
NetD1_1: D1.1 R5.1 | length 3.2
  Bottom Layer w0.6: R5.1 109.626,64 D1.1
NetD2_1: D2.1 L1.1 | length 11.3
  Bottom Layer w0.6: L1.1 126,94.374 D2.1
NetD3_A1: D3.A1 T2.16 | length 17.4
  Bottom Layer w1.5: T2.16 189.75,83.25 D3.A1
NetD3_A2: D3.A2 T2.15 | length 27.2
  Bottom Layer w1.5: T2.15 175.17,84.38 185.34,74.21 D3.A2
NetD4_2: D4.2 D5.1 R10.1 | length 57.7
  Top Layer w0.6: v1(142.5,130) v1(188.25,130)
  Bottom Layer w0.6: D5.1 134.563,129.563 136.937,129.563 D4.2 137.374,130 v1(142.5,130) ; v1(188.25,130) R10.1
NetD6_2: D6.2 R18.2 R19.1 | length 8.4
  Bottom Layer w0.6: D6.2 93.938,132.114 94.824,133 R18.2 R19.1
NetD7_2: D7.2 R22.2 R23.1 | length 8.4
  Bottom Layer w0.6: R23.1 R22.2 119.176,133 120.062,132.114 D7.2
NetQ3_1: Q3.1 R19.2 | length 13.3
  Bottom Layer w0.6: Q3.1 102.17,146.484 101,145.314 101,139 103,137 R19.2
NetQ4_1: Q4.1 R23.2 | length 15.7
  Bottom Layer w0.6: R23.2 112,137 113,138 113,144 115.977,146.977 Q4.1
NetR3_1: R3.1 T1.1 | length 7.5
  Bottom Layer w0.6: R3.1 137,141.25 137.315,141.25 137.65,141.585 T1.1
NetR3_2: R3.2 T1.3 | length 5.8
  Bottom Layer w0.6: T1.3 141.35,138.15 R3.2
NetR8_1: R8.1 R14.2 U3.1 | length 13.7
  Bottom Layer w0.6: U3.1 138.81,74.69 141.475,72.025 142.975,72.025 R14.2 R8.1
NetR10_2: R10.2 R11.1 | length 8
  Bottom Layer w0.6: R10.2 R11.1
NetR18_1: R18.1 T3.3 | length 6
  Bottom Layer w0.6: R18.1 97.5,123 T3.3
NetR21_1: R21.1 U5.7 | length 4
  Bottom Layer w0.6: U5.7 104.4,109.571 105,110.171 R21.1
NetR21_2: R21.2 T3.1 TP5.1 | length 17.7
  Bottom Layer w0.6: TP5.1 92.077,116.923 92.077,115.923 R21.2 99,113 T3.1
NetR22_1: R22.1 T3.5 | length 6
  Bottom Layer w0.6: T3.5 116.5,123 R22.1
NetR25_2: R25.2 U6.1 | length 2.9
  Bottom Layer w0.6: U6.1 111.13,91.905 111.825,92.6 112,92.6
NetT1_7: T1.7 T2.1 | length 36.3
  Bottom Layer w2: T1.7 143,145.375 143.275,145.1 146.4,145.1 146.999,144.501 149.75,141.75 149.75,133.33 159.93,123.15 T2.1@165.01,123.15
OC: C21.1 C22.1 D4.1 R13.2 TP2.1 U6.3 | length 61.9
  Top Layer w0.6: v1(111.5,89.1) v1@114.9,89.1 ; v1@114.991,89.135 v1(115.035,89.135) ; v1(116,94.5) v1(116,99)
  Bottom Layer w0.6: U6.3 v1@111.054,89.365 ; v1(115.035,89.135) 116,90.1 v1(116,94.5) ; v1(116,99) 116,102.5 119.75,106.25 ; TP2.1 116.108,106 116.358,106.25 119.75,106.25 ; R13.2 132.5,124 C22.1 ; D4.1 C22.1 ; 119.75,106.25 125.75,106.25 129.5,110 129.5,114 132.5,117 C22.1
P_GND: C1.2 C2.2 C3.2 C4.2 C5.2 C6.2 C8.2 C9.2 C10.2 C16.1 C18.1 C21.2 C22.2 C32.1 D5.2 HS1.1 J2.1 NT1.1 Q2.S Q4.3 R13.1 R24.1 T3.6 TP8.1 U1.2 | length 255.2
  Top Layer w0.6: v1(127,142) v1(127,149)
  Bottom Layer w0.6: 56.028,27 105,27 110,32 ; C8.2 113.08,42 U1.2 110,32 ; TP8.1 115,120 111,124 111,127 112.5,128.5 T3.6 114,136 R24.1 ; Q4.3 118,144.507 119,143.507 R24.1 ; Q2.S 127,150 v1(127,149) ; 124,168.735 122.735,170 152,170 C18.1 C16.1 ; v1(127,142) v1@126.937,141.937 ; NT1.1 127.386,112.533 127.386,116.966 127.42,117 C22.2 127.07,122.35 127.07,123.43 R13.1 126.759,128.259 126.759,129.385 D5.2 126.937,129.563 v1@126.937,141.937 ; C32.1@131,32 110,32 ; R24.1 120,140 125,140 v1@126.937,141.937
  Bottom Layer w1.5: Q2.S 124,168.735
RT: R12.2 R15.2 U6.2 | length 17.7
  Bottom Layer w0.6: U6.2 112.365,90.635 113.5,89.5 113.5,82.5 R15.2 R12.2
S_GND: C11.2 C12.2 C13.2 C14.2 C15.2 C17.2 C32.2 HS2.1 J3.1 R17.1 T2.12 T2.13 U2.2 U4.2 | length 245.8
  Bottom Layer w0.6: C32.2 147.6,32 147.8,31.8 ; U4.2 146.191,58.809 153.5,51.5 R17.1 159,55.5 168,55.5 ; J3.1 151.238,37.262 160.975,47 168,47 168,55.5 ; 159,95.6 164.08,95.6 ; C17.2@162.08,71.5 162.08,68.42 U2.2 168,67 ; C12.2 C15.2 ; C14.2 191.074,34.071 191.074,49.926 C11.2 182.229,50 181.229,49 C15.2 ; HS2.1@193.559,64.3 HS2.1@194,64.3 ; HS2.1@194,89.7 194,90.1 186,98.1 164.6,98.1 164.08,97.58 164.08,95.6 ; 164.08,95.6 164.08,85.745 168,81.825 ; 168,55.5 168,67 ; 168,67 168,81.825 ; 168,81.825 180.5,69.325 C13.2 180.5,62.675 180.904,62.271 C15.2
Vadd: D2.2 T2.7 | length 33.2
  Bottom Layer w0.6: D2.2 149.75,117.75 T2.7@149.75,123
VDD: C26.2 C27.2 C30.2 C31.2 J1.2 R5.2 R6.1 U5.6 U6.7 | length 110.5
  Bottom Layer w0.6: R5.2@96.75,64.25 93.23,67.77 93.23,68.5 ; U6.7 101.94,90.635 101.225,91.35 C30.2 C31.2 97.85,91.5 97.625,91.5 95.5,91.5 93.23,89.23 ; U5.6 106.749,109.009 106.749,107.749 105.35,106.35 C27.2 C26.2 92.85,106.35 90.5,104 90.5,91.96 93.23,89.23 ; R6.1 116,74.5 110,68.5 93.23,68.5 ; 93.23,68.5 J1.2 93.23,89.23
Vpower: C1.1 C2.1 C3.1 C4.1 C5.1 C6.1 C9.1 C10.1 J2.3 Q1.D R1.1 R2.1 R4.1 | length 269.4
  Bottom Layer w0.7: J2.3 J2.3@64.453,34.927 ; 70.5,38.5 71,38 R4.1 R2.1 R1.1
  Bottom Layer w1.5: C9.1@79.5,164.1 81.135,165.735 ; 96.52,165.735 102.5,159.755 Q1.D
  Bottom Layer w2: J2.3 64.026,39.261 74.5,49.735 C3.1 C4.1 74.5,105.25 C6.1 74.5,138.2 79.6,143.3 79.6,164 C9.1@79.5,164.1
  Bottom Layer w3: C1.1 C2.1 47,105.25 ; C5.1 47,105.25 ; 74.5,105.25 47,105.25
pads on no net: HS1.2 J2.2 T1.4 T1.6 T1.NC T2.3 T2.6 T2.9 T2.10 T2.11 T2.14 U5.1 U5.8

## Polygon pours and split planes (outlines as drawn)
S_GND on Bottom Layer "NONET_L-01_P-001" (solid, pour order 7): 165.5,77.5 166.5,76.5 166.5,51 164,48.5 151,48.5 147,44.5 147,28.5 148,27.5 154,27.5 155,28.5 155,40 158,43 169.5,43 171,44.5 171,67 173,69 177,69 179,67 179,32.5 180,31.5 191,31.5 194,34.5 194,56 196.5,58.5 196.5,66.5 194.5,68.5 187,68.5 174.5,81 166.5,89 166.5,98.02 165.52,99 157.5,99 156.5,98 156.5,86.5
P_GND on Bottom Layer "P_GND_L02_P000" (solid, remove dead copper, pour order 0): 107,169.5 104.5,172.085 70.5,172.085 68,169.585 67.945,169.5 67.945,47.625 57.15,36.83 57.15,26.67 27.94,26.67 27.94,179.705 158.115,179.705 160.655,177.165 160.655,140.97 159.385,139.7 154.305,139.7 153.67,140.335 153.67,153.67 149.86,157.48 123.825,157.48 122.555,158.75 122.555,158.841 120.896,160.5 109,160.5 107,162.5
Vpower on Bottom Layer "NONET_L-01_P-001" (solid, remove dead copper, pour order 3): 70.485,167.005 73.025,169.545 102.235,169.545 104.14,167.64 104.14,158.75 102.87,157.48 98.425,157.48 96.52,159.385 96.52,163.195 95.25,164.465 83.185,164.465 83.185,126.365 80.01,123.19 80.01,45.72 70.485,36.195 70.485,29.21 59.055,29.21 59.055,38.735 70.485,50.165
+24V on Bottom Layer "NONET_L-01_P-001" (solid, remove dead copper, pour order 5): 193.5,54.5 196.5,57.5 196.5,72 193.5,75 193.5,77.5 194.4,78.4 200,78.4 201,77.4 201,31 198.5,28.5 197,27 178.5,27 160.5,27.1 157.9,27.1 156,29 156,38.5 160,42.5 170,42.5 171.5,44 171.5,66 173.5,68 177,68 178.5,66.5 178.5,31 191.5,31 193.5,33

## Silkscreen, mask and mechanical layers (free items; w line width, h text height)
Mechanical 1:
  the board outline again, w0.254